# Altium PCB PCB2.PcbDoc
Units mil, origin at the board's own origin, x right, y up, seen from the top; angles counter-clockwise.
Board outline 3240 x 3220 mil, 2 copper layers (Top Layer, Bottom Layer); 32 components, 25 nets, 162 pads, 1 vias.
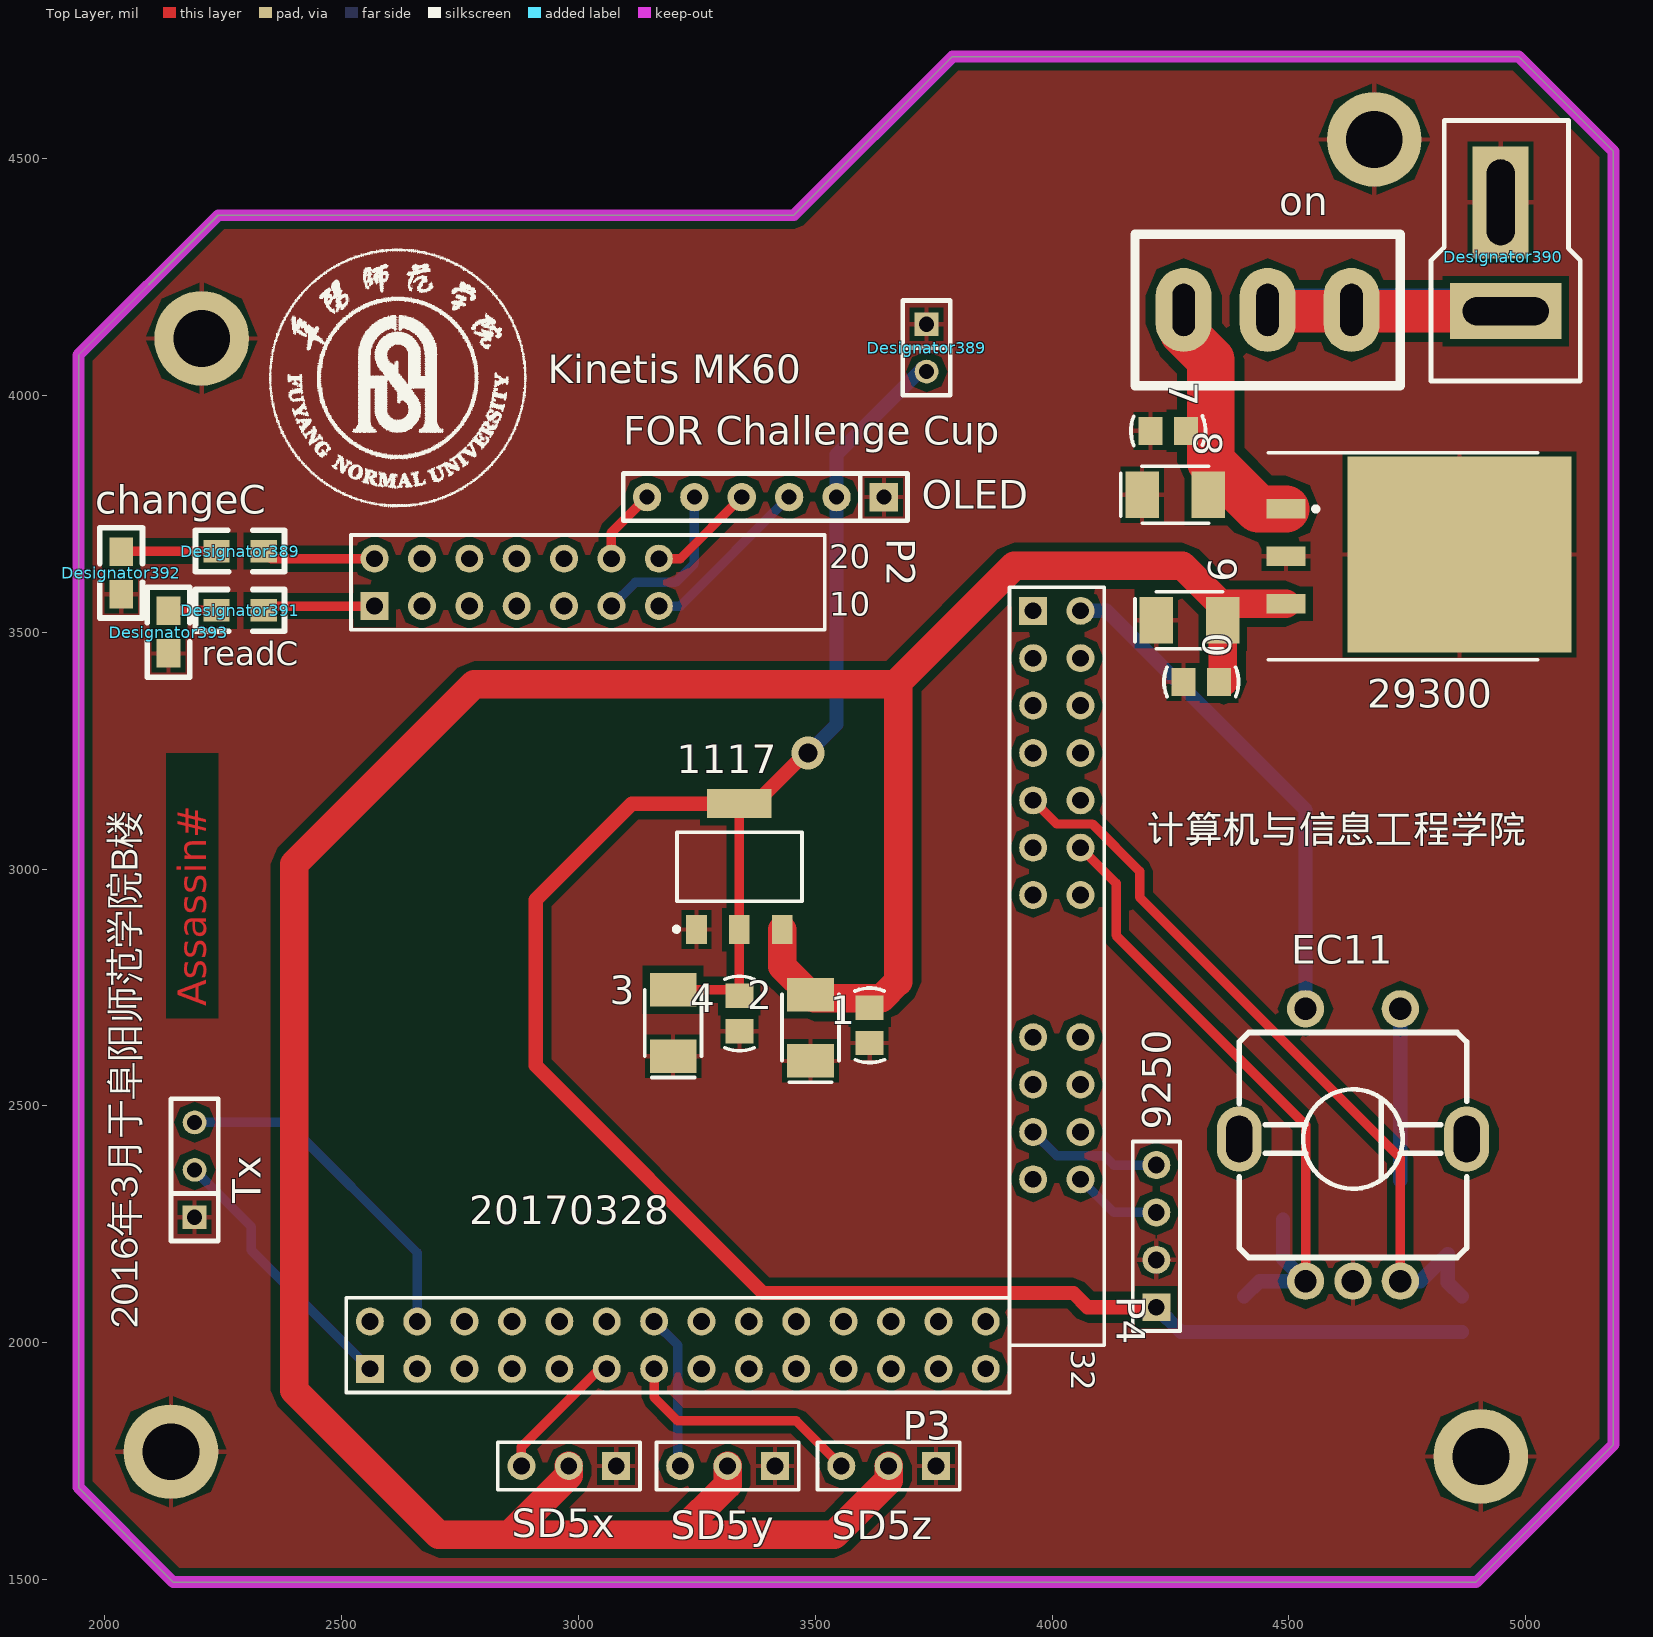
[diagram p0: Top Layer view]
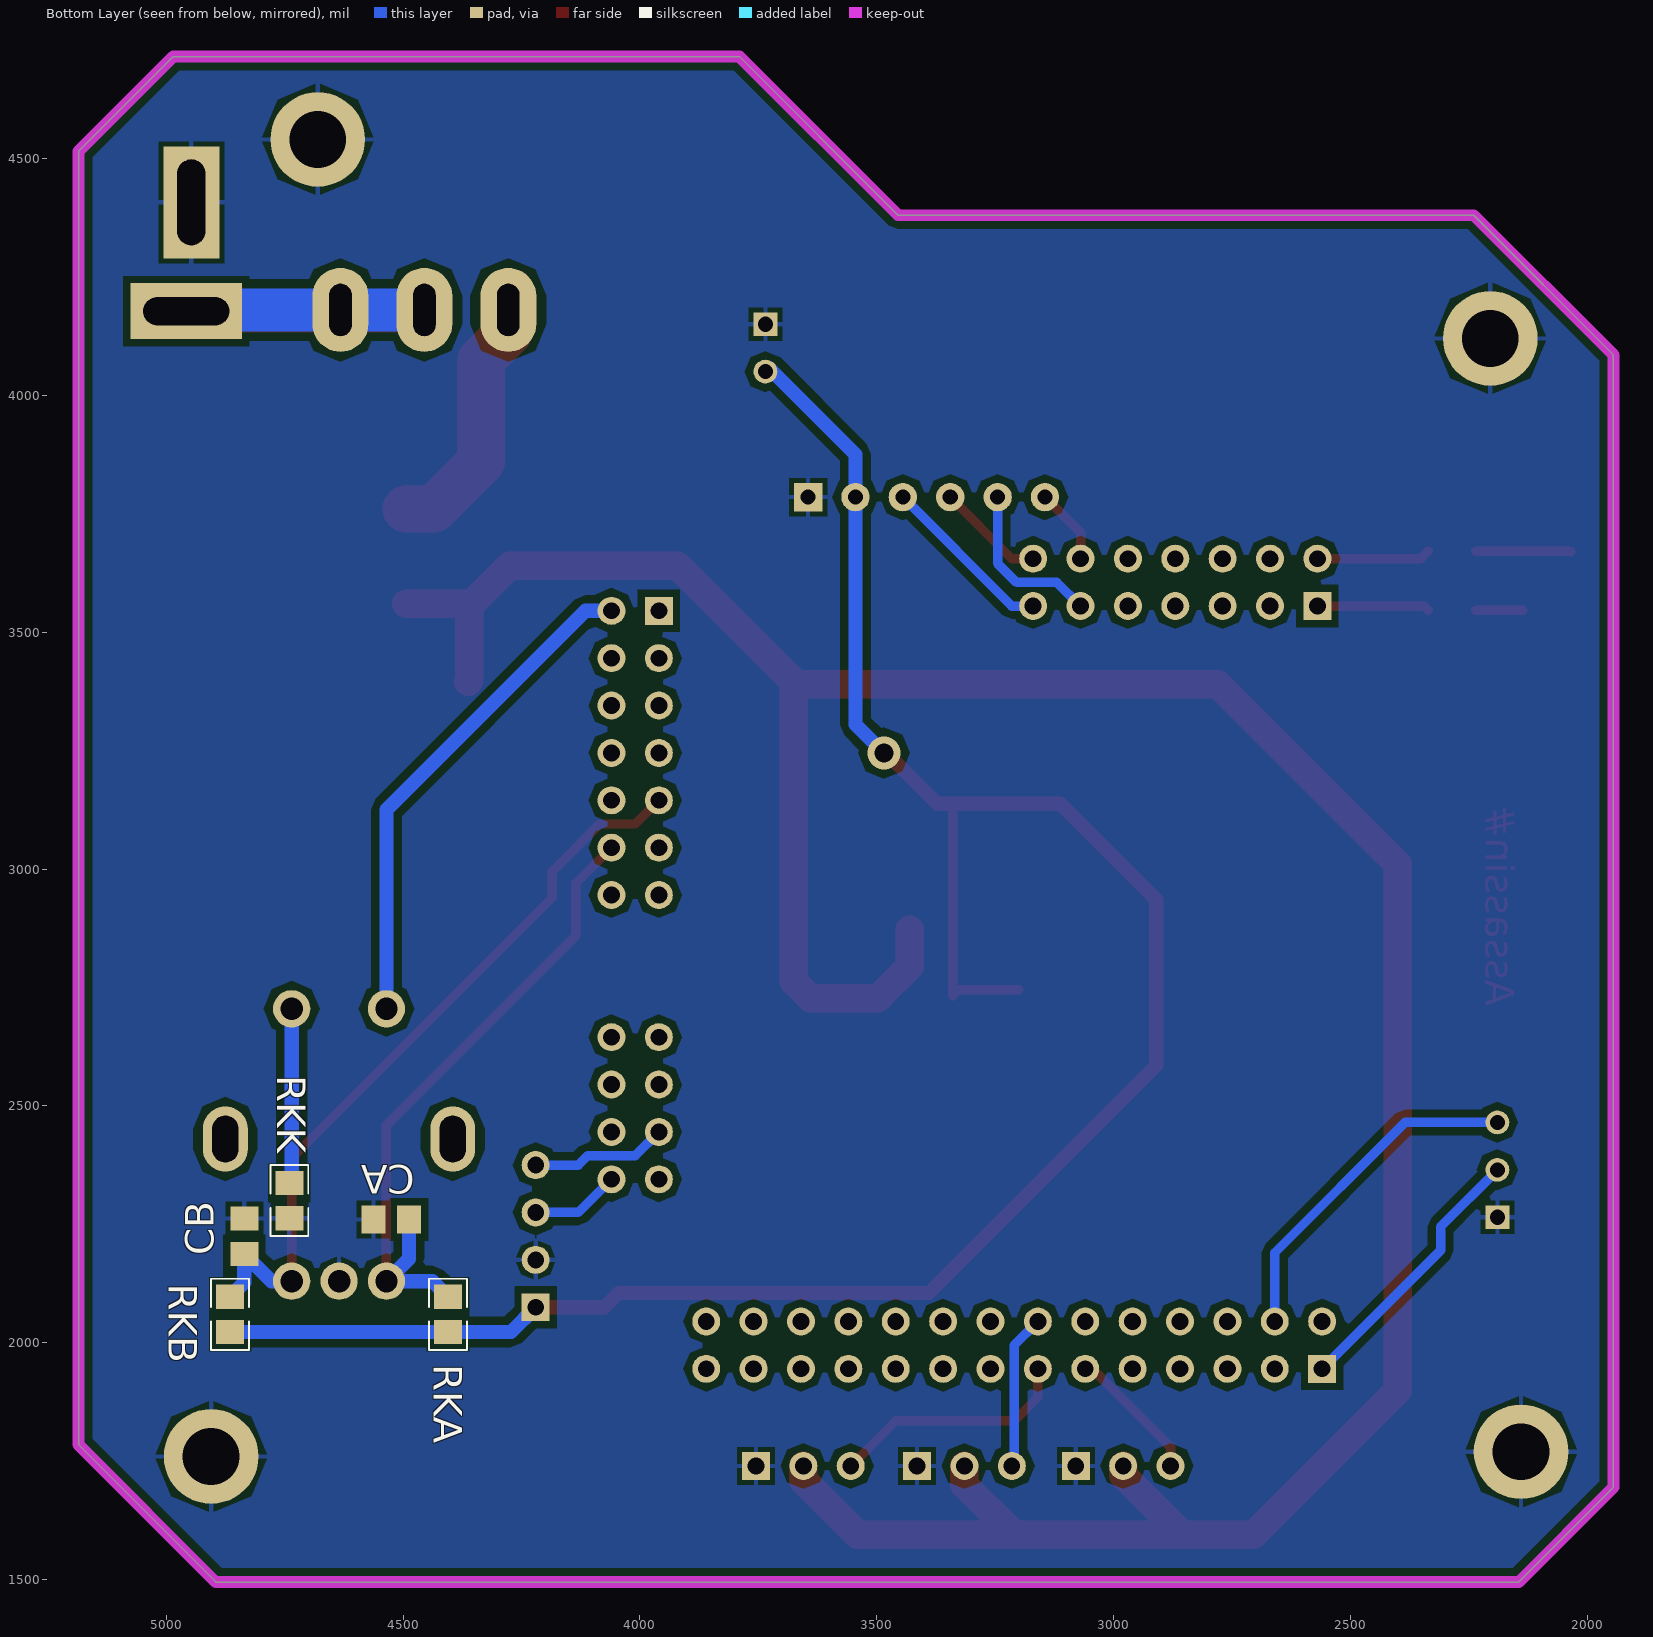
[diagram p1: Bottom Layer view, seen from below]

## Layer stack, top to bottom
Top Layer: signal copper 1.4
Dielectric: dielectric 12.6, FR-4, Dk 4.8
Bottom Layer: signal copper 1.4

## Board outline
1945,1695 2145,1495 4895,1495 5185,1785 5185,4515 4985,4715 3790,4715 3455,4380 2240,4380 1945,4085

## Design rules (kind name [scope] priority, off if disabled: settings)
Clearance [InPolygon] p1: gap=15
ComponentClearance [All] p1: gap=0 collisioncheckmode=3 verticalgap=0 showdistances=FALSE
PolygonConnect [All] p1: connectstyle=Relief reliefconductorwidth=10 reliefentries=4 polygonreliefangle="90 Angle" airgapwidth=10
RoutingVias [All] p1: holewidth=28 width=50 viastyle="Through Hole" minholewidth=28 minwidth=50 maxholewidth=28 maxwidth=50
SolderMaskExpansion [All] p1: expansion=4
Width [All] p1: maxlimit=100 minlimit=10 preferedwidth=10
27 further rules are at their usual default settings.

## Classes and differential pairs
component class Sheet1: 0 1 2 3 4 7 8 9 1117 9250 29300 CA CB EC11 on P2 P3 P4 RKA RKB RKK SD5x SD5y

## Components (designator, comment, footprint, x,y, rotation, side; value= is the part's Value field where it differs from the comment)
0 "Cap" C-RAD-0805 4315,3395 r0 top
1 "Cap" C-RAD-0805 3615,2670 r90 top
2 "Cap Pol" CAP-3528 3490,2665 r90 top
3 "Cap Pol" CAP-3528 3200,2675 r90 top
4 "Cap" C-RAD-0805 3340,2695 r90 top
7 "Cap" C-RAD-0805 4245,3925 r0 top
8 "Cap Pol" CAP-3528 4260,3790 r0 top
9 "Cap Pol" CAP-3528 4290,3525 r0 top
1117 "ASM1117" SOT-223 3340,3005 r0 top
9250 "Header 4" HDR4X1_A 4220,2075 r90 top
29300 "LM2940-5.0V" TO-263-3 4660,3660 r270 top (schematic designator U?)
CA "Cap" 0805-2 4525,2260 r0 bottom
CB "Cap" 0805-2 4835,2225 r270 bottom
Designator389 "Comment" 0805A 2380,3715 r180 top
Designator389 "Comment" SIP2 3735,4150 r270 top
Designator390 "Comment" T插头(公头) 5120,4020 r90 top
Designator391 "Comment" 0805A 2380,3590 r180 top
Designator392 "Comment" 0805 2035,3670 r270 top
Designator393 "Comment" 0805 2135,3545 r270 top
EC11 "EC11" EC11 4635,2430 r0 top
OLED "Comment" SIP6 3645,3785 r180 top
on "HEADER 3" 钮子开关 4735,4340 r180 top
P2 "Header 10X2A" HDR2X10_CEN 2570,3555 r0 top
P3 "Header 16X2A" HDR2X16_CEN 3960,3545 r270 top
P4 "Header 14X2A" HDR2X14_CEN 2560,1945 r0 top
RKA "10k" 0805-1 4405,2060 r90 bottom
RKB "10k" 0805-1 4865,2060 r270 bottom
RKK "10k" 0805-1 4740,2300 r90 bottom
SD5x "" HDR1X3 3080,1740 r180 top (schematic designator S3010x)
SD5y "" HDR1X3 3415,1740 r180 top (schematic designator S3010y)
SD5z "" HDR1X3 3755,1740 r180 top (schematic designator S3010y)
Tx "Comment" SIP3 2190,2265 r90 top

## Footprints (in the part's own frame and the unit in brackets; to place one, negate y for a bottom-side part, rotate by r counter-clockwise, add the part's x,y. Pads: shape width x height; smd on the part's side, far side on the other; paste and mask are expansions set on the pad)
0805 [mil]
  rect 60x50 smd: 1(0,0) 2(90,0)
  silkscreen extent -50,-45 140,45
0805-1 [mm] "贴片带丝印"
  rect 1.3x1.5 smd: 1(-0.95,0) 2(0.95,0)
  silkscreen extent -1.91,-1.02 1.91,1.02, body extent -1.14,-0.51 1.14,0.51, height 1
0805-2 [mm] "贴片无丝印"
  rect 1.3x1.5 smd: 1(-0.95,0) 2(0.95,0)
0805A [mm]
  rect 1.4x1.2 smd: 1(1.116,1.116) 2(3.656,1.116)
  silkscreen extent 0,0 4.77,2.23
C-RAD-0805 [mm] "贴片电容"
  rect 1.3x1.5 smd: 1(-0.95,0) 2(0.95,0)
  silkscreen extent -2,-0.79 2,0.79, body extent -1.27,-0.64 1.27,0.64, height 0.9
CAP-3528 [mm] "钽电容"
  rect 1.8x2.5 smd: 1(-1.778,0) 2(1.778,0)
  silkscreen extent -2.92,-1.52 1.78,1.52, body extent -1.91,-1.4 1.91,1.4, height 1.1
EC11 [mm]
  round 2 hole 1.2: 1(-2.54,-7.62) 2(0,-7.62) 3(2.54,-7.62) 4(2.54,6.985) 5(-2.54,6.985)
  oval 2.4x3.5 hole 1.4 slot 2.5 at 90 deg: 6(-6.096,0) 7(6.096,0)
  silkscreen extent -6.1,-6.35 6.1,5.71
HDR1X3 [mm] "Connector; Header; 3 Position"
  rect 1.5x1.5 hole 0.9: 1(0,0)
  round 1.5 hole 0.9: 2(2.54,0) 3(5.08,0)
  silkscreen extent -1.27,-1.27 6.35,1.27
HDR2X10_CEN [mm] "Connector; Header; 10x2 Position"
  rect 1.5x1.5 hole 0.9: 1(0,0)
  round 1.5 hole 0.9: 2(2.54,0) 3(5.08,0) 4(7.62,0) 5(10.16,0) 6(12.7,0) 7(15.24,0) 11(0,2.54) 12(2.54,2.54) 13(5.08,2.54) 14(7.62,2.54) 15(10.16,2.54) 16(12.7,2.54) 17(15.24,2.54)
  round 0 all layers, no hole: 8(17.78,0) 9(20.32,0) 10(22.86,0) 18(17.78,2.54) 19(20.32,2.54) 20(22.86,2.54)
  silkscreen extent -1.27,-1.27 24.13,3.81
HDR2X14_CEN [mm] "Connector; Header; 14x2 Position"
  rect 1.5x1.5 hole 0.9: 1(0,0)
  round 1.5 hole 0.9: 2(2.54,0) 3(5.08,0) 4(7.62,0) 5(10.16,0) 6(12.7,0) 7(15.24,0) 8(17.78,0) 9(20.32,0) 10(22.86,0) 11(25.4,0) 12(27.94,0) 13(30.48,0) 14(33.02,0) 15(0,2.54) 16(2.54,2.54) 17(5.08,2.54) 18(7.62,2.54) 19(10.16,2.54) 20(12.7,2.54) 21(15.24,2.54) 22(17.78,2.54) 23(20.32,2.54) 24(22.86,2.54) 25(25.4,2.54) 26(27.94,2.54) 27(30.48,2.54) 28(33.02,2.54)
  silkscreen extent -1.27,-1.27 34.29,3.81
HDR2X16_CEN [mm] "Connector; Header; 16x2 Position"
  rect 1.5x1.5 hole 0.9: 1(0,0)
  round 1.5 hole 0.9: 2(2.54,0) 3(5.08,0) 4(7.62,0) 5(10.16,0) 6(12.7,0) 7(15.24,0) 10(22.86,0) 11(25.4,0) 12(27.94,0) 13(30.48,0) 17(0,2.54) 18(2.54,2.54) 19(5.08,2.54) 20(7.62,2.54) 21(10.16,2.54) 22(12.7,2.54) 23(15.24,2.54) 26(22.86,2.54) 27(25.4,2.54) 28(27.94,2.54) 29(30.48,2.54)
  round 0 all layers, no hole: 8(17.78,0) 9(20.32,0) 14(33.02,0) 15(35.56,0) 16(38.1,0) 24(17.78,2.54) 25(20.32,2.54) 30(33.02,2.54) 31(35.56,2.54) 32(38.1,2.54)
  silkscreen extent -1.27,-1.27 39.37,3.81
HDR4X1_A [mm] "Connector; Header; 4 Position"
  rect 1.5x1.5 hole 0.9: 1(0,0)
  round 1.5 hole 0.9: 2(2.54,0) 3(5.08,0) 4(7.62,0)
  silkscreen extent -1.27,-1.27 8.89,1.27
SIP2 [mil]
  rect 50x50 hole 32: 1(0,0)
  round 50 hole 32: 2(100,0)
  silkscreen extent -50,-50 150,50
SIP3 [mil]
  rect 50x50 hole 32: 1(0,0)
  round 50 hole 32: 2(100,0) 3(200,0)
  silkscreen extent -50,-50 250,50
SIP6 [mil]
  rect 60x60 hole 32: 1(0,0)
  round 60 hole 32: 2(100,0) 3(200,0) 4(300,0) 5(400,0) 6(500,0)
  silkscreen extent -50,-50 550,50
SOT-223 [mm]
  rect 1.1x1.55 smd: 1(-2.3,-3.375) 2(0,-3.375) 3(2.3,-3.375)
  rect 3.45x1.55 smd: 4(0,3.375)
  silkscreen extent -3.5,-3.48 3.35,1.85, body extent -3.3,-3.94 3.3,3.43, height 0.8
TO-263-3 [mm] "LM2940/LM1086"
  rect 1.05x2.1 smd: 1(-2.54,-4.225) 2(0,-4.225) 3(2.54,-4.225)
  rect 10.5x12 smd: 4(-0.104,5.08)
  silkscreen extent -5.55,-5.17 5.55,9.28, body extent -5.33,-4.7 5.33,9.27, height 1.6
T插头(公头) [mm]
  rect 3x6 hole 1.5 slot 4.6 at 90 deg: 1(4,4.127)
  rect 6x3 hole 1.5 slot 4.6 at 0 deg: 2(9.834,4.4)
  silkscreen extent 0.25,0.13 14.22,8.13
钮子开关 [mm]
  oval 3x4.5 hole 1.2 slot 2.8 at 90 deg: 1(2.612,4.064) 2(7.112,4.064) 3(11.612,4.064)
  silkscreen extent 0,0 14.22,8.13

## Part data
0 1 4 7 CA CB: "无极性电容"
2 3 8 9: "极性电解电容"
1117: "3.3V稳压芯片"
9250: "接插件"
29300: library part LM2940, "5V稳压芯片"
P2: "Header, 10-Pin, Dual row"
P3: "Header, 16-Pin, Dual row"
P4: "Header, 14-Pin, Dual row"
RKA RKB RKK: library part Res2, "Resistor"
SD5x SD5y SD5z: library part "Header 3", "Header, 3-Pin"

## Free pads (board coordinates)
  round 200 hole 120: 0(4680,4540) 1(2205,4120) 2(2140,1770) 3(4905,1760)

## Via types
v1: diameter 70, hole 40, Top Layer to Bottom Layer, 1 vias

## Nets (pads, with @x,y where several pads share a name; then routed paths per layer and width w, separated by ;. In a path a pad name is that pad's centre, name@x,y a point inside that pad or via, vN(x,y) a via of type N, cw(c..) or ccw(c..) an arc to the next point about the centre after c; other vN are vias at no path point)
5V: 0.2 1.2 2.2 9.2 1117.3 29300.3 SD5x.2 SD5y.2 SD5z.2 | length 6496.4
  Top Layer w60: SD5x.2 2980,1720 2855,1595 ; SD5y.2 3315,1700 3210,1595 ; 1117.3 3430.55,2794.45 2.2 3497.6,2727.4 3640,2727.4 3675,2762.4 3675,3390 2780,3390 2400,3010 2400,1900 2705,1595 2855,1595 ; SD5z.2 3655,1710 3540,1595 3210,1595 ; 3677.5,3397.5 3920,3640 4275,3640 9.2@4360,3555 ; 0.2@4362.4,3395 4360,3397.4 9.2 9.2@4360,3555 ; 29300.3 4360,3560 9.2@4360,3555 ; 2855,1595 3210,1595
CC1: Designator389.2@2236.06,3671.06 Designator392.1 | length 201.5
  Top Layer w20: Designator392.1 2036.06,3671.06 Designator389.2@2236.06,3671.06
CC2: Designator391.2 Designator393.1 | length 100
  Top Layer w20: Designator393.1@2136.06,3546.06 Designator391.2
CHECKING: Designator389.1@2336.06,3671.06 P2.11 | length 240.6
  Top Layer w20: Designator389.1@2336.06,3671.06 2352.13,3655 P2.11
DPWMX: P4.6 SD5x.3 | length 288.3
  Top Layer w20: SD5x.3 2880,1780 3045,1945 P4.6
DPWMY: P4.21 SD5y.3 | length 344
  Bottom Layer w20: P4.21 3210,1995 3210,1750 SD5y.3@3230,1730
DPWMz: P4.7 SD5z.3 | length 515.1
  Top Layer w20: P4.7 3160,1885 3210,1835 3460,1835 SD5z.3
GND: 0.1 1.1 2.1 3.1 4.1 7.1 8.1 9.1 1117.1 9250.2 29300.2 29300.4 CA.2 CB.1 Designator389.1@3735,4150 Designator390.2 Designator392.2 Designator393.2 EC11.2 OLED.1 pad.0 pad.1 pad.2 pad.3 RKK.1 SD5x.1 SD5y.1 SD5z.1 Tx.1
GPIO-KEY: EC11.5 P3.17 | length 1069
  Bottom Layer w30: P3.17 4115,3545 4535,3125 EC11.5
Net7_2: 7.2 8.2 29300.1 on.3 | length 543.8
  Top Layer w100: on.3 4277.83,4132.17 4335,4075 4335,3860 4435,3760 29300.1
NetEC11_4: EC11.4 RKK.2 | length 362.6
  Bottom Layer w30: RKK.2@4735,2342.4 EC11.4
NetLED_2: 
Netoled_1: OLED.6 P2.16 | length 161.1
  Top Layer w20: P2.16 3070,3710 OLED.6
Netoled_2: OLED.5 P2.6 | length 352.3
  Bottom Layer w20: P2.6 3120,3605 3205,3605 3245,3645 OLED.5
Netoled_3: OLED.4 P2.17 | length 228.8
  Top Layer w20: P2.17 3215,3655 OLED.4
Netoled_4: OLED.3 P2.7 | length 370.3
  Bottom Layer w20: P2.7 3215,3555 OLED.3
Neton_1: Designator390.1 on.1 on.2 | length 1007.1
  Top Layer w90: on.2 4457.52,4177.48 Designator390.1
  Bottom Layer w90: on.2 on.1 4955,4180 Designator390.1
point: Designator391.1 P2.1 | length 237.6
  Top Layer w20: Designator391.1 2345,3555 P2.1
SCL: 9250.3 P3.29 | length 189
  Bottom Layer w20: P3.29 4130,2275 9250.3
SDA: 9250.4 P3.12 | length 289
  Bottom Layer w20: P3.12 4010,2395 4110,2395 4130,2375 9250.4
TA: CA.1 EC11.1 P3.22 RKA.2 | length 1404.9
  Top Layer w20: P3.22 4135,2970 4135,2860 4535,2460 EC11.1
  Bottom Layer w30: RKA.2 4437.6,2130 EC11.1 4487.6,2177.4 CA.1
TB: CB.2 EC11.3 P3.5 RKB.1 | length 1606.4
  Top Layer w20: P3.5 4010,3095 4085,3095 4185,2995 4185,2940 4735,2390 EC11.3
  Bottom Layer w30: EC11.3 4777.4,2130 CB.2 4835,2127.4 RKB.1
UART1: P4.1 Tx.2 | length 573.3
  Bottom Layer w20: Tx.2 2310,2245 2310,2195 P4.1
UART2: P4.16 Tx.3 | length 728.9
  Bottom Layer w20: Tx.3 2385,2465 2660,2190 P4.16
V3.3: 3.2 4.2 1117.2 1117.4 9250.1 Designator389.2@3735,4050 OLED.2 RKA.1 RKB.2 | length 4703.5
  Top Layer w20: 3.2 3327.4,2745 4.2 1117.2 1117.4
  Top Layer w30: v1@3482.5,3247.5 3372.87,3137.87 1117.4 3112.87,3137.87 2910,2935 2910,2585 3390,2105 4045,2105 4075,2075 9250.1
  Bottom Layer w30: v1(3485,3245) 3545,3305 3545,3875 Designator389.2@3727.5,4057.5 ; 9250.1 4272.4,2022.6 RKA.1 RKB.2
pads on no net: EC11.6 EC11.7 P2.2 P2.3 P2.4 P2.5 P2.8 P2.9 P2.10 P2.12 P2.13 P2.14 P2.15 P2.18 P2.19 P2.20 P3.1 P3.2 P3.3 P3.4 P3.6 P3.7 P3.8 P3.9 P3.10 P3.11 P3.13 P3.14 P3.15 P3.16 P3.18 P3.19 P3.20 P3.21 P3.23 P3.24 P3.25 P3.26 P3.27 P3.28 P3.30 P3.31 P3.32 P4.2 P4.3 P4.4 P4.5 P4.8 P4.9 P4.10 P4.11 P4.12 P4.13 P4.14 P4.15 P4.17 P4.18 P4.19 P4.20 P4.22 P4.23 P4.24 P4.25 P4.26 P4.27 P4.28

## Polygon pours and split planes (outlines as drawn)
GND on Bottom Layer "Bottom Layer-No Net" (solid, remove dead copper, pour order 4): 1805,4870 1890,4785 5975,4785 5975,1935 5515,1475 5270,1230 2090,1230 2090,1485 1450,2125
GND on Top Layer "Bottom Layer-No Net" (solid, remove dead copper, pour order 6): 1830,4855 1895,4790 5400,4790 5400,1385 5220,1205 5120,1305 1810,1305

## Keep-outs
Keep-Out Layer:
  the board outline again, w25

## Other copper
Top Layer:
  text "Assassin#" at 2215,2710 h60 r90

## Silkscreen, mask and mechanical layers (free items; w line width, h text height)
Top Overlay:
  drawing of 24411 lines, arcs and shapes, not listed
  text "Kinetis MK60" at 2935,4025 h60
  text "FOR Challenge Cup" at 3095,3895 h60
  text "changeC" at 1980,3750 h60
  text "计算机与信息工程学院" at 4200,3035 h100
  text "20170328" at 2770,2250 h60
  text "2016年3月于阜阳师范学院B楼" at 2090,2030 h100 r90

## Text inside footprints (layer, text, board x,y; h text height)
P2: Top Overlay "20" at 3530,3635 h50; Top Overlay "10" at 3530,3535 h50; Top Overlay "readC" at 2205,3430 h50
P3: Top Overlay "32" at 4040,1985 h50 r270